# EAGLE board main2 (EAGLE 9.6.2), part 1 of 2
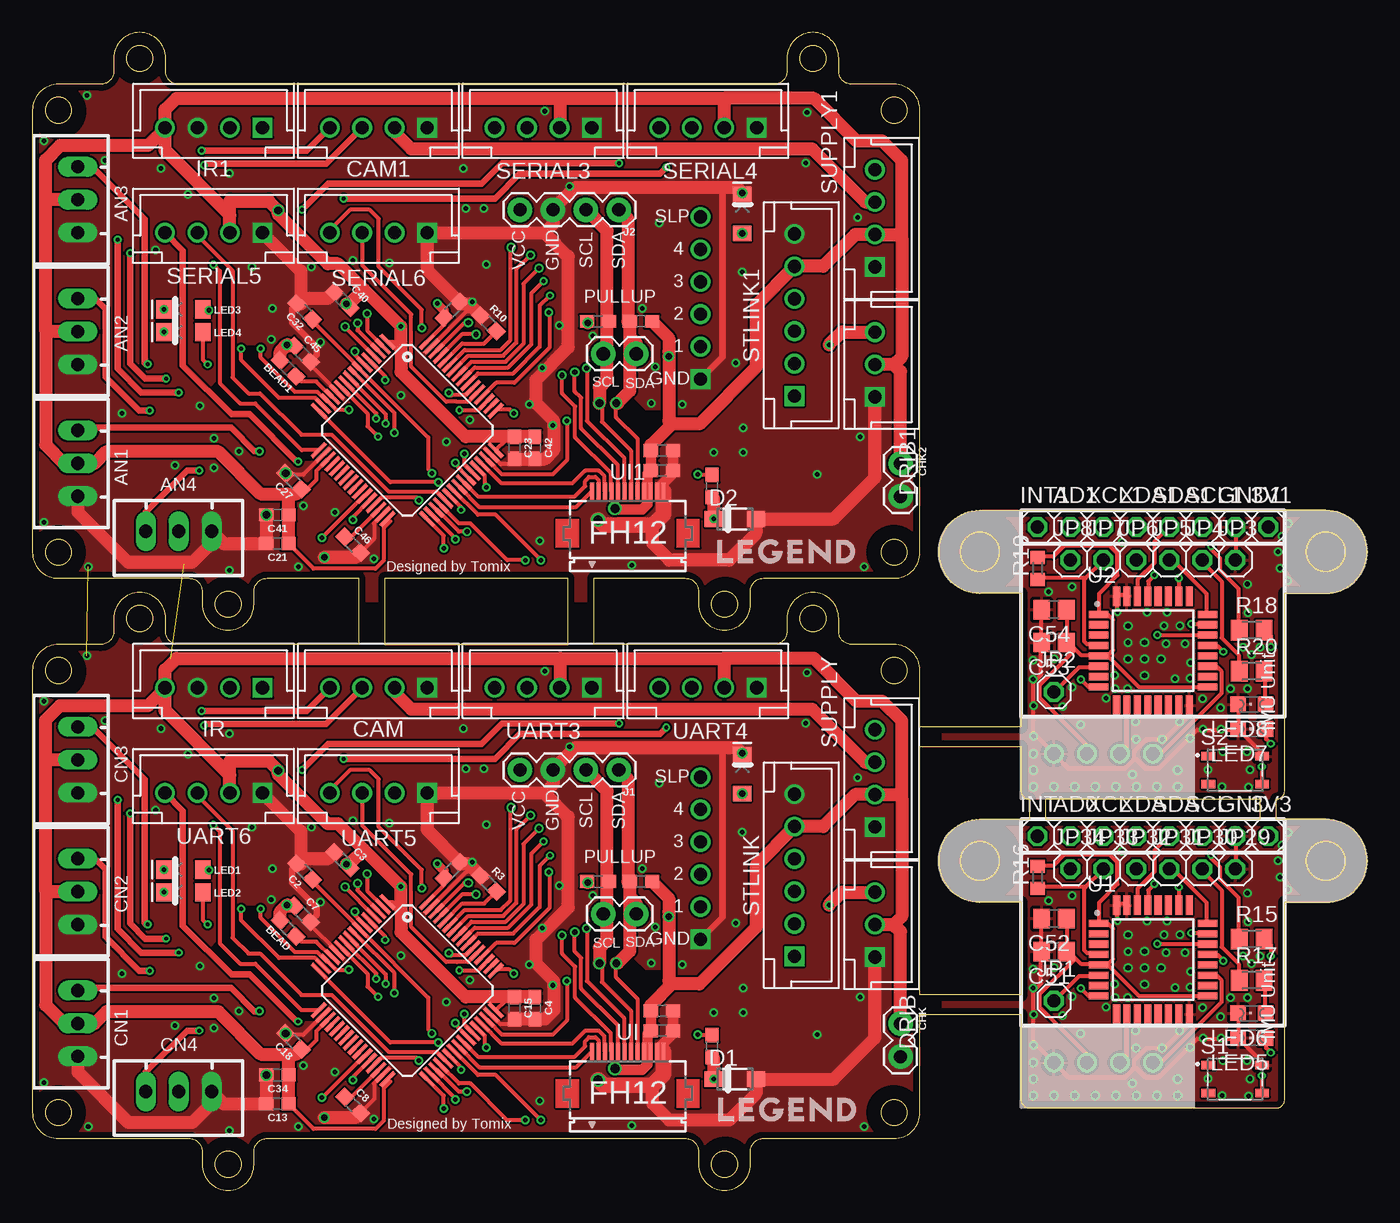
[diagram p0: board, top side]
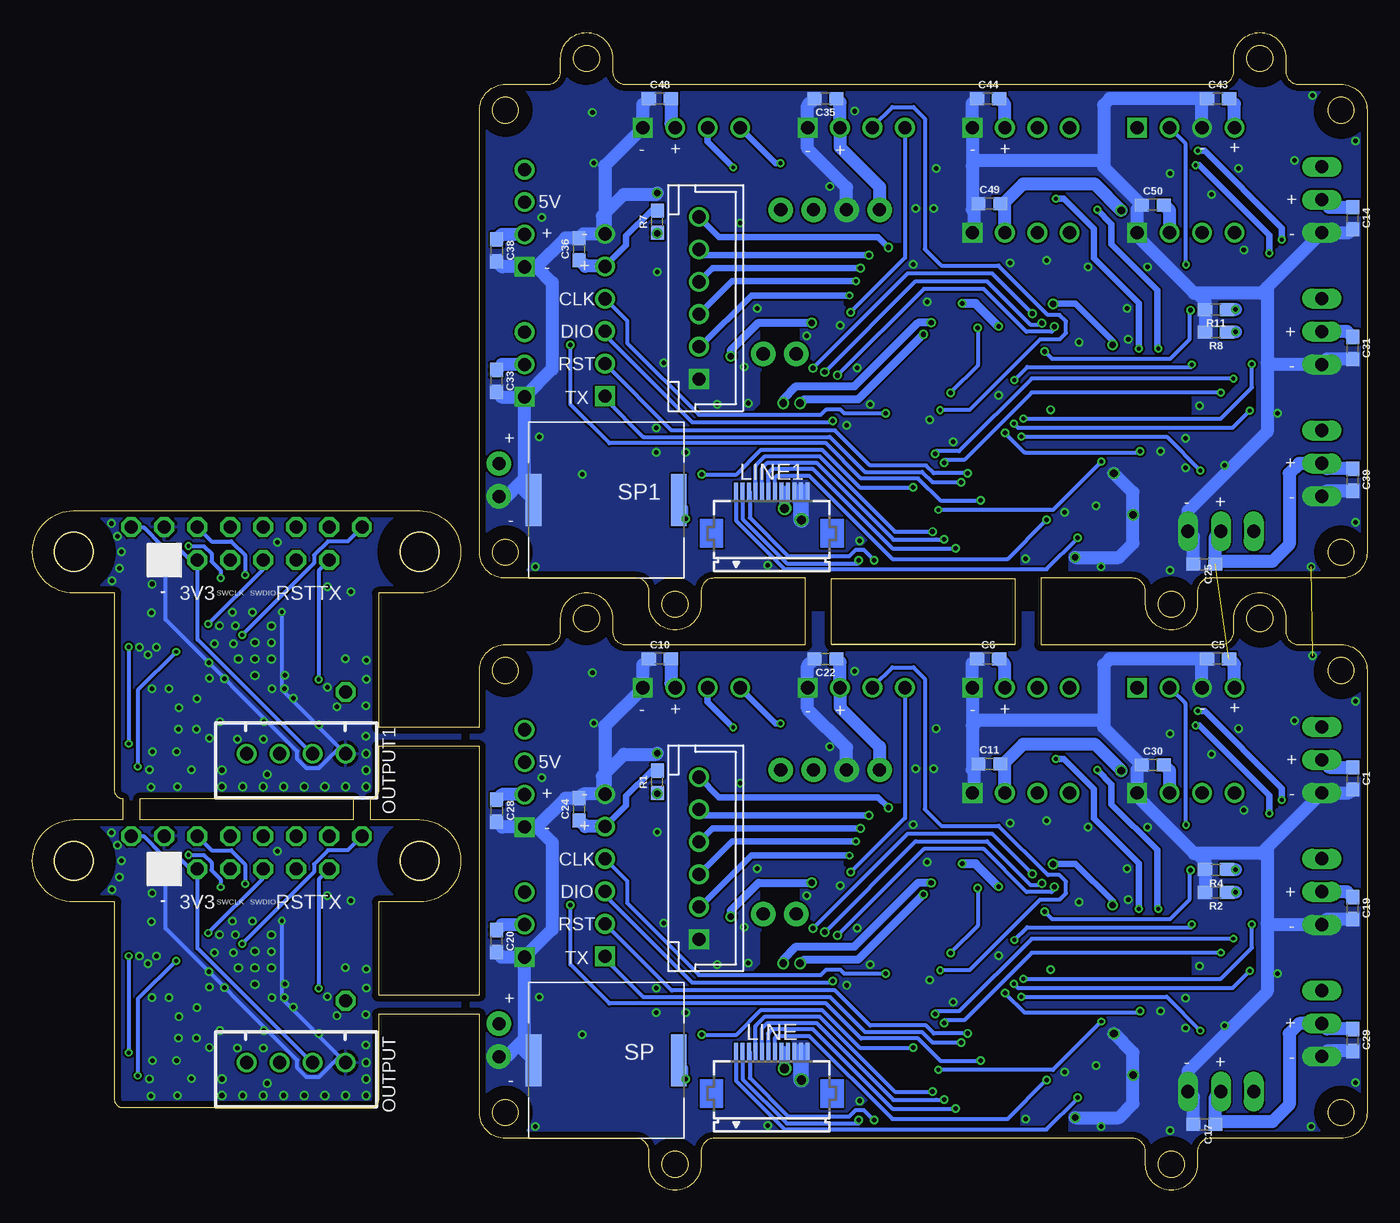
[diagram p1: board, bottom side, seen from below]

Size 102.87 x 89.25 mm. Coordinates in mm from the lower left corner, seen from the top.
Outline: 41.27,42.08 27.14,42.07
Outline: 78.11,28.57 78.11,30.16 94.61,30.16 94.61,28.57 78.11,28.57
Outline: 76.2,35.71 68.42,35.71 68.42,40.07 arc90 66.42,42.07 63.15,42.07 arc-90 62.15,43.07 62.15,44.07 arc180 58.15,44.07 58.15,43.07 arc-90 57.15,42.07 43.27,42.07 43.27,47.18 50.34,47.18 arc-90 51.34,46.18 51.34,45.18 arc180 55.34,45.18 55.34,46.18 arc-90 56.34,47.18 66.42,47.18 arc90 68.42,49.18 68.42,83.25 arc90 66.42,85.25 63.15,85.25 arc-90 62.15,86.25 62.15,87.25 arc180 58.15,87.25 58.15,86.25 arc-90 57.15,85.25 34.21,85.25 11.26,85.25 arc-90 10.26,86.25 10.26,87.25 arc180 6.26,87.25 6.26,86.25 arc-90 5.26,85.25 2,85.25 arc90 0,83.25 0,49.18 arc90 2,47.18 12.08,47.18 arc-90 13.08,46.18 13.08,45.18 arc180 17.08,45.18 17.08,46.18 arc-90 18.08,47.18 25.14,47.18 25.14,42.07 11.26,42.07 arc-90 10.26,43.07 10.26,44.07 arc180 6.26,44.07 6.26,43.07 arc-90 5.26,42.07 2,42.07 arc90 0,40.07 0,6 arc90 2,4 12.08,4 arc-90 13.08,3 13.08,2 arc180 17.08,2 17.08,3 arc-90 18.08,4 34.21,4 50.34,4 arc-90 51.34,3 51.34,2 arc180 55.34,2 55.34,3 arc-90 56.34,4 66.42,4 arc90 68.42,6 68.42,13.55 76.2,13.55 76.2,6.98 arc90 76.83,6.35 95.89,6.35 arc90 96.52,6.98 96.52,22.23 99.69,22.23 arc90 102.87,25.4 arc90 99.69,28.57 95.89,28.57 95.89,30.16 arc90 96.52,30.8 96.52,46.04 99.69,46.04 arc90 102.87,49.21 arc90 99.69,52.39 73.03,52.39 arc90 69.85,49.21 arc90 73.03,46.04 76.2,46.04 76.2,35.71
Outline: 76.2,15.05 68.42,15.05 68.42,34.21 76.2,34.21 76.2,30.8 arc90 76.83,30.16 76.83,28.57 73.03,28.57 arc90 69.85,25.4 arc90 73.03,22.23 76.2,22.23 76.2,15.05
Outline: 27.16,47.17 27.16,42.07 41.27,42.07 41.27,47.17 27.16,47.17
Outline: circle at 2,6 radius 1
Outline: circle at 2,49.18 radius 1
Outline: circle at 73.03,25.4 radius 1.5
Outline: circle at 99.69,25.4 radius 1.5
Outline: circle at 73.03,49.21 radius 1.5
Outline: circle at 99.69,49.21 radius 1.5
Outline: circle at 2,83.25 radius 1
Outline: circle at 66.42,49.18 radius 1
Outline: circle at 66.42,83.25 radius 1
Outline: circle at 8.26,87.25 radius 1
Outline: circle at 60.15,87.25 radius 1
Outline: circle at 15.08,45.18 radius 1
Outline: circle at 53.34,45.18 radius 1
Outline: circle at 2,6 radius 1
Outline: circle at 2,40.07 radius 1
Outline: circle at 66.42,6 radius 1
Outline: circle at 66.42,40.07 radius 1
Outline: circle at 8.26,44.07 radius 1
Outline: circle at 60.15,44.07 radius 1
Outline: circle at 15.08,2 radius 1
Copper layers (1*16): Top 0.035mm / dielectric 1.6mm / Bottom 0.035mm
Design rules "Elecrow_2-layer_PCB_eagle_rule": minimum track width 6mil, minimum drill 12mil, track to track 6mil, track to pad 6mil, pad to pad 6mil, via to via 8mil, smd to smd 0mil, copper to edge 20mil, drill to drill 10mil, minimum pad ring 6mil, minimum via ring 6mil, stop-mask expansion 0mil, vias tented up to drill 100mil, thermal gap 10mil
Net classes: 1 GND: width 0.32 mm, drill 0.254 mm; 2 power: width 0.32 mm, drill 0.102 mm
Holes 3 mm at 73.03,25.4 99.69,25.4 73.03,49.21 99.69,49.21
tRestrict: area -0.1,3.9 to 4.1,8.1; area 13,-0.1 to 17.2,4.1; area 51.3,-0.1 to 55.5,4.1; area 64.3,3.9 to 68.5,8.1; area 64.4,38.1 to 68.4,42.1; area 58.1,42.1 to 62.1,46.1; area 6.2,42.1 to 10.2,46.1; area -0.1,37.9 to 4.1,42.1; area -0.1,47.1 to 4.1,51.2; area 13,43.1 to 17.2,47.3; area 51.3,43.1 to 55.5,47.2; area 64.3,47.1 to 68.5,51.2; area 64.4,81.2 to 68.4,85.3; area 58.1,85.3 to 62.1,89.3; area 6.2,85.3 to 10.2,89.3; area -0.1,81.1 to 4.1,85.3; area 69.9,22.2 to 76.2,28.6; area 96.5,22.2 to 102.9,28.6; area 69.9,46 to 76.2,52.4; area 96.5,46 to 102.9,52.4; 12 lines
bRestrict: area -0.1,37.9 to 4.1,42.1; area 6.1,41.9 to 10.3,46.1; area 58.2,42.1 to 62.2,46.1; area 64.4,38.1 to 68.4,42.1; area 64.4,4 to 68.4,8; area 51.4,0 to 55.4,4; area 13,-0.1 to 17.2,4.1; area 0,4 to 4,8; area -0.1,81.1 to 4.1,85.2; area 6.1,85.1 to 10.3,89.3; area 58.2,85.3 to 62.2,89.3; area 64.4,81.3 to 68.4,85.3; area 64.4,47.2 to 68.4,51.2; area 51.4,43.2 to 55.4,47.2; area 13,43.1 to 17.2,47.3; area 0,47.2 to 4,51.2; area 69.9,22.2 to 76.2,28.6; area 96.5,22.2 to 102.9,28.6; area 69.9,46 to 76.2,52.4; area 96.5,46 to 102.9,52.4; 60 lines

## Footprints (pad centres in the part's own frame; a part is rotated, then mirrored left to right if it is on the bottom)
1X01 = drill 1.016 octagon: 1 0,0
JST-XH-03-PACKAGE-LONG-PAD = drill 1.016 long: 1 -2.54,0; 2 0,0; 3 2.54,0
0603 = smd 1.1 x 1: 1 -0.85,0; 2 0.85,0
1608 = smd 1.1 x 1: 1 -0.85,0; 2 0.85,0
C0805 = smd 1.3 x 1.5: 1 -0.95,0; 2 0.95,0
B4B-XH-A = drill 1.016 square: 1 -3.75,0 | drill 1.016: 2 -1.25,0; 3 1.25,0; 4 3.75,0
1X02 = drill 1.016 pad 1.88: 1 0,0; 2 2.54,0
SOD123FL = smd 1.397 x 1.22: A 1.625,0; C -1.625,0
B3B-XH-A = drill 1.016 square: 1 -2.5,0 | drill 1.016: 2 0,0; 3 2.5,0
1X04 = drill 1.016 pad 1.88: 1 0,0; 2 2.54,0; 3 5.08,0; 4 7.62,0
LED-1206 = smd 1.2 x 1.4: A -1.5,0; C 1.5,0
CHIPLED_0805 = smd 1.2 x 1.2: A 0,-1.05; C 0,1.05
FH12-12S-0.5SH = smd 0.3 x 1.3: 1 -2.75,3.25; 2 -2.25,3.25; 3 -1.75,3.25; 4 -1.25,3.25; 5 -0.75,3.25; 6 -0.25,3.25; 7 0.25,3.25; 8 0.75,3.25; 9 1.25,3.25; 10 1.75,3.25; 11 2.25,3.25; 12 2.75,3.25
B6B-XH-A = drill 1.016 square: 1 -6.25,0 | drill 1.016: 2 -3.75,0; 3 -1.25,0; 4 1.25,0; 5 3.75,0; 6 6.25,0
STM32F446RET6 = smd 0.3 x 1.5: BOOT0 -1.75,5.9; PA3 -3.75,-5.9; PA4 -2.25,-5.9; PA5 -1.75,-5.9; PA6 -1.25,-5.9; PA7 -0.75,-5.9; PA14 3.75,5.9; PA15 3.25,5.9; PB0 0.75,-5.9; PB1 1.25,-5.9; PB2 1.75,-5.9; PB3 0.75,5.9; PB4 0.25,5.9; PB5 -0.25,5.9; PB6 -0.75,5.9; PB7 -1.25,5.9; PB8 -2.25,5.9; PB9 -2.75,5.9; PB10 2.25,-5.9; PC4 -0.25,-5.9; PC5 0.25,-5.9; PC10 2.75,5.9; PC11 2.25,5.9; PC12 1.75,5.9; PD2 1.25,5.9; VCAP_1 2.75,-5.9; VDD -2.75,-5.9; VDD1 3.75,-5.9; VDD3 -3.75,5.9; VSS -3.25,-5.9; VSS1 3.25,-5.9; VSS3 -3.25,5.9 | smd 1.5 x 0.3: NRST -5.9,0.75; PA0 -5.9,-2.75; PA1 -5.9,-3.25; PA2 -5.9,-3.75; PA8 5.9,0.25; PA9 5.9,0.75; PA10 5.9,1.25; PA11 5.9,1.75; PA12 5.9,2.25; PA13 5.9,2.75; PB12 5.9,-3.75; PB13 5.9,-3.25; PB14 5.9,-2.75; PB15 5.9,-2.25; PC0 -5.9,0.25; PC1 -5.9,-0.25; PC2 -5.9,-0.75; PC3 -5.9,-1.25; PC6 5.9,-1.75; PC7 5.9,-1.25; PC8 5.9,-0.75; PC9 5.9,-0.25; PC13 -5.9,3.25; PC14 -5.9,2.75; PC15 -5.9,2.25; PH0 -5.9,1.75; PH1 -5.9,1.25; VBAT -5.9,3.75; VDD2 5.9,3.75; VREF+ -5.9,-2.25; VREF- -5.9,-1.75; VSS2 5.9,3.25
JST-XH-04-PACKAGE-ROUND-PAD = drill 1.016: 1 -3.81,0; 2 -1.27,0; 3 1.27,0; 4 3.81,0
R0603 = smd 1.1 x 1: 1 -0.85,0; 2 0.85,0
M0805 = smd 1.3 x 1.6: 1 -0.95,0; 2 0.95,0
R0603' = smd 1 x 1.1: 1 -0.85,0; 2 0.85,0
SW_SKRPACE010 = smd 1.05 x 0.65: 1 -2.075,1.075; 2 2.075,1.075; 3 -2.075,-1.075; 4 2.075,-1.075
PKLCS1212E4001 = smd 1.2 x 4: 1 -5.6,0; 2 5.6,0
QFP80P900X900X160-32N = smd 1.5 x 0.55: 1 -4.2,2.8; 2 -4.2,2; 3 -4.2,1.2; 4 -4.2,0.4; 5 -4.2,-0.4; 6 -4.2,-1.2; 7 -4.2,-2; 8 -4.2,-2.8; 17 4.2,-2.8; 18 4.2,-2; 19 4.2,-1.2; 20 4.2,-0.4; 21 4.2,0.4; 22 4.2,1.2; 23 4.2,2; 24 4.2,2.8 | smd 0.55 x 1.5: 9 -2.8,-4.2; 10 -2,-4.2; 11 -1.2,-4.2; 12 -0.4,-4.2; 13 0.4,-4.2; 14 1.2,-4.2; 15 2,-4.2; 16 2.8,-4.2; 25 2.8,4.2; 26 2,4.2; 27 1.2,4.2; 28 0.4,4.2; 29 -0.4,4.2; 30 -1.2,4.2; 31 -2,4.2; 32 -2.8,4.2

## Placement (x,y rotation side)
3V1  [1X01]  95.25,51.12 0 top
3V3  [1X01]  95.25,27.3 0 top
AD0  [1X01]  80.01,27.3 0 top
AD1  [1X01]  80.01,51.12 0 top
AN1  1  [JST-XH-03-PACKAGE-LONG-PAD]  3.49,56.04 90 top
AN2  2  [JST-XH-03-PACKAGE-LONG-PAD]  3.49,66.2 90 top
AN3  3  [JST-XH-03-PACKAGE-LONG-PAD]  3.49,76.36 90 top
AN4  4  [JST-XH-03-PACKAGE-LONG-PAD]  11.27,50.8 180 top
BEAD  0  [0603]  19.7,20.18 135 top
BEAD1  0  [0603]  19.7,63.37 135 top
C1  0.1uF  [1608]  1.11,31.75 270 bottom
C2  0.1UF_1608  [1608]  20.98,24.56 135 top
C3  0.1UF_1608  [1608]  23.89,25.45 315 top
C4  0.1UF_1608  [1608]  38.72,14.05 270 top
C5  0.1UF_1608  [1608]  11.49,40.97 0 bottom
C6  0.1UF_1608  [1608]  29.21,40.97 0 bottom
C7  0.1UF_1608  [1608]  20.81,21.3 315 top
C8  4.7uF  [0603]  24.68,6.58 315 top
C9  0.1uF  [0603]  32.34,24.68 45 top
C10  0.1UF_1608  [1608]  54.51,40.97 0 bottom
C11  0.1UF_1608  [1608]  29.11,32.88 0 bottom
C12  0.1UF_1608  [1608]  48.52,13.84 0 top
C13  0.1UF_1608  [1608]  18.89,6.67 180 top
C14  0.1uF  [1608]  1.11,74.93 270 bottom
C15  0.1UF_1608  [1608]  37.15,14.05 270 top
C16  0.1UF_1608  [1608]  48.52,57.02 0 top
C17  0.1UF_1608  [1608]  12.54,5.08 180 bottom
C18  0.1UF_1608  [1608]  20.12,11.48 135 top
C19  0.1UF_1608  [1608]  1.11,21.75 270 bottom
C20  0.1UF_1608  [1608]  67.11,19.21 270 bottom
C21  0.1UF_1608  [1608]  18.89,49.85 180 top
C22  0.1UF_1608  [1608]  41.75,40.97 180 bottom
C23  0.1UF_1608  [1608]  37.15,57.23 270 top
C24  0.1UF_1608  [1608]  60.73,29.37 90 bottom
C25  0.1UF_1608  [1608]  12.54,48.26 180 bottom
C26  0.001UF_1608  [1608]  48.52,12.31 0 top
C27  0.1UF_1608  [1608]  20.12,54.66 135 top
C28  1.0UF_1608  [1608]  67.08,29.27 270 bottom
C29  1.0UF_1608  [1608]  1.11,11.59 270 bottom
C30  0.1UF_1608  [1608]  16.51,32.77 0 bottom
C31  0.1UF_1608  [1608]  1.11,64.93 270 bottom
C32  0.1UF_1608  [1608]  20.98,67.74 135 top
C33  0.1UF_1608  [1608]  67.11,62.39 270 bottom
C34  0.1uF  [0603]  18.89,8.89 180 top
C35  0.1UF_1608  [1608]  41.75,84.15 180 bottom
C36  0.1UF_1608  [1608]  60.73,72.55 90 bottom
C37  0.001UF_1608  [1608]  48.52,55.49 0 top
C38  1.0UF_1608  [1608]  67.08,72.45 270 bottom
C39  1.0UF_1608  [1608]  1.11,54.77 270 bottom
C40  0.1UF_1608  [1608]  23.89,68.63 315 top
C41  0.1uF  [0603]  18.89,52.07 180 top
C42  0.1UF_1608  [1608]  38.72,57.23 270 top
C43  0.1UF_1608  [1608]  11.49,84.15 0 bottom
C44  0.1UF_1608  [1608]  29.21,84.15 0 bottom
C45  0.1UF_1608  [1608]  20.81,64.48 315 top
C46  4.7uF  [0603]  24.68,49.77 315 top
C47  0.1uF  [0603]  32.34,67.86 45 top
C48  0.1UF_1608  [1608]  54.51,84.15 0 bottom
C49  0.1UF_1608  [1608]  29.11,76.06 0 bottom
C50  0.1UF_1608  [1608]  16.51,75.95 0 bottom
C51  0.1u  [C0805]  78.74,18.41 180 top
C52  0.1u  [C0805]  78.74,20.95 180 top
C53  0.1u  [C0805]  78.74,42.23 180 top
C54  0.1u  [C0805]  78.74,44.77 180 top
CAM  cam  [B4B-XH-A]  26.67,38.73 180 top
CAM1  cam  [B4B-XH-A]  26.67,81.92 180 top
CHK  +3V3  [1X02]  66.91,12.84 270 top
CHK1  +3V3  [1X02]  44,21.3 0 top
CHK2  +3V3  [1X02]  66.91,56.02 270 top
CHK3  +3V3  [1X02]  44,64.48 0 top
CN1  1  [JST-XH-03-PACKAGE-LONG-PAD]  3.49,12.86 90 top
CN2  2  [JST-XH-03-PACKAGE-LONG-PAD]  3.49,23.02 90 top
CN3  3  [JST-XH-03-PACKAGE-LONG-PAD]  3.49,33.18 90 top
CN4  4  [JST-XH-03-PACKAGE-LONG-PAD]  11.27,7.62 180 top
D1  DIODE-SS2040LFL  [SOD123FL]  54.13,8.57 0 top
D2  DIODE-SS2040LFL  [SOD123FL]  54.13,51.75 0 top
DRIB  [B3B-XH-A]  64.93,20.48 90 top
DRIB1  [B3B-XH-A]  64.93,63.66 90 top
GND  [1X01]  92.71,27.3 0 top
GND1  [1X01]  92.71,51.12 0 top
INT  [1X01]  77.47,27.3 0 top
INT1  [1X01]  77.47,51.12 0 top
IR  IR  [B4B-XH-A]  13.97,38.73 180 top
IR1  IR  [B4B-XH-A]  13.97,81.92 180 top
J1  [1X04]  45.2,32.4 180 top
J2  [1X04]  45.2,75.58 180 top
JP1  [1X01]  78.74,14.6 0 top
JP2  [1X01]  78.74,38.42 0 top
JP3  [1X01]  92.71,48.58 0 top
JP4  [1X01]  90.17,48.58 0 top
JP5  [1X01]  87.63,48.58 0 top
JP6  [1X01]  85.09,48.58 0 top
JP7  [1X01]  82.55,48.58 0 top
JP8  [1X01]  80.01,48.58 0 top
JP29  [1X01]  92.71,24.77 0 top
JP30  [1X01]  90.17,24.77 0 top
JP31  [1X01]  87.63,24.77 0 top
JP32  [1X01]  85.09,24.77 0 top
JP33  [1X01]  82.55,24.77 0 top
JP34  [1X01]  80.01,24.77 0 top
LED1  [LED-1206]  11.63,24.72 180 top
LED2  [LED-1206]  11.63,22.98 180 top
LED3  [LED-1206]  11.63,67.9 180 top
LED4  [LED-1206]  11.63,66.16 180 top
LED5  [CHIPLED_0805]  93.98,11.75 90 top
LED6  [CHIPLED_0805]  93.98,13.65 90 top
LED7  [CHIPLED_0805]  93.98,35.56 90 top
LED8  [CHIPLED_0805]  93.98,37.47 90 top
LINE  FH12-12S-0.5SH  [FH12-12S-0.5SH]  45.88,7.46 0 bottom
LINE1  FH12-12S-0.5SH  [FH12-12S-0.5SH]  45.88,50.64 0 bottom
MD_A  [B6B-XH-A]  51.5,25.6 90 bottom
MD_A1  [B6B-XH-A]  51.5,68.78 90 bottom
NUCLEO_MAIN  F446RET6  [STM32F446RET6]  28.89,15.4 315 top
NUCLEO_MAIN1  F446RET6  [STM32F446RET6]  28.89,58.58 315 top
OUTPUT  JST-XH-04-PIN-ROUND-PAD  [JST-XH-04-PACKAGE-ROUND-PAD]  82.55,9.84 180 bottom
OUTPUT1  JST-XH-04-PIN-ROUND-PAD  [JST-XH-04-PACKAGE-ROUND-PAD]  82.55,33.66 180 bottom
PILOT  [LED-1206]  54.7,32.09 90 top
PILOT1  [LED-1206]  54.7,75.27 90 top
R1  1k  [R0603]  54.7,31.49 90 bottom
R2  1k  [R0603]  11.63,22.98 180 bottom
R3  10k  [R0603]  35.16,23.64 315 top
R4  1k  [R0603]  11.63,24.72 180 bottom
R5  1k  [R0603]  46.9,23.8 0 top
R6  1k  [R0603]  43.6,23.8 180 top
R7  1k  [R0603]  54.7,74.67 90 bottom
R8  1k  [R0603]  11.63,66.16 180 bottom
R9  1k  [R0603]  52.39,11.11 270 top
R10  10k  [R0603]  35.16,66.82 315 top
R11  1k  [R0603]  11.63,67.9 180 bottom
R12  1k  [R0603]  52.39,54.29 270 top
R13  1k  [R0603]  46.9,66.98 0 top
R14  1k  [R0603]  43.6,66.98 180 top
R15  1k  [M0805]  93.98,19.37 0 top
R16  10k  [R0603']  77.47,24.13 90 top
R17  1k  [M0805]  93.98,16.19 0 top
R18  1k  [M0805]  93.98,43.18 0 top
R19  10k  [R0603']  77.47,47.94 90 top
R20  1k  [M0805]  93.98,40.01 0 top
S1  SKRPACE010  [SW_SKRPACE010]  92.71,8.57 0 top
S2  SKRPACE010  [SW_SKRPACE010]  92.71,32.38 0 top
SCL  [1X01]  90.17,27.3 0 top
SCL1  [1X01]  90.17,51.12 0 top
SDA  [1X01]  87.63,27.3 0 top
SDA1  [1X01]  87.63,51.12 0 top
SERIAL3  IMU  [B4B-XH-A]  39.37,81.92 180 top
SERIAL4  IMU  [B4B-XH-A]  52.07,81.92 180 top
SERIAL5  IMU  [B4B-XH-A]  13.97,73.82 180 top
SERIAL6  IMU  [B4B-XH-A]  26.67,73.82 180 top
SP  [PKLCS1212E4001]  58.64,10.02 180 bottom
SP1  [PKLCS1212E4001]  58.64,53.2 180 bottom
STLINK  MAIN  [B6B-XH-A]  58.74,24.29 90 top
STLINK1  MAIN  [B6B-XH-A]  58.74,67.47 90 top
SUPPLY  [B4B-XH-A]  64.93,31.75 90 top
SUPPLY1  [B4B-XH-A]  64.93,74.93 90 top
U1  STM32F303K8T6  [QFP80P900X900X160-32N]  86.36,17.78 0 top
U2  STM32F303K8T6  [QFP80P900X900X160-32N]  86.36,41.59 0 top
UART3  IMU  [B4B-XH-A]  39.37,38.73 180 top
UART4  IMU  [B4B-XH-A]  52.07,38.73 180 top
UART5  IMU  [B4B-XH-A]  26.67,30.64 180 top
UART6  IMU  [B4B-XH-A]  13.97,30.64 180 top
UI  FH12-12S-0.5SH  [FH12-12S-0.5SH]  45.88,7.46 0 top
UI1  FH12-12S-0.5SH  [FH12-12S-0.5SH]  45.88,50.64 0 top
XCL  [1X01]  82.55,27.3 0 top
XCL1  [1X01]  82.55,51.12 0 top
XDA  [1X01]  85.09,27.3 0 top
XDA1  [1X01]  85.09,51.12 0 top

## Library data of the parts
3V1 3V3 AD0 AD1 GND GND1 INT INT1 JP1-JP8 JP29-JP34 SCL SCL1 SDA SDA1 XCL XCL1 XDA XDA1 = pinhead
AN1-AN4 CN1-CN4 OUTPUT OUTPUT1 = JST XH Connectors
BEAD BEAD1 = SparkFun-Resistors; PROD_ID: RES-08609
C1-C7 C10-C25 C27 C30-C33 C35 C36 C40 C42-C45 C48-C50 LED1-LED4 PILOT PILOT1 = Custom_Designed_By_Yusei
C8 C9 C34 C41 C46 C47 = SparkFun-Capacitors; PROD_ID: CAP-00810
C26 C37 = Custom_Designed_By_Yusei; CAPACITY: 0.001uF
C28 C38 = Custom_Designed_By_Yusei; CAPACITY: 1.0uF
C29 C39 = Custom_Designed_By_Yusei; CAPACITY: 1.0uF; SPECIFICATION: X5R
C51-C54 R15-R20 = resistor
CAM CAM1 DRIB DRIB1 IR IR1 MD_A MD_A1 SERIAL3-SERIAL6 STLINK STLINK1 SUPPLY SUPPLY1 UART3-UART6 = jst-xh
CHK CHK1-CHK3 = SparkFun-Connectors
D1 D2 = Custom_Designed_By_Yusei; CATEGORY: Optional
J1 J2 = SparkFun-Connectors; PROD_ID: CONN-09696
LED5-LED8 = led
LINE LINE1 UI UI1 = con-hirose; MPN: FH12-12S-0.5SH(55); OC_FARNELL: 1324542; OC_NEWARK: 34M6155
NUCLEO_MAIN NUCLEO_MAIN1 = STM32F446RET6
R1-R8 R10 R11 R13 R14 = Custom_Designed_By_Yusei; PROD_ID: RES-07856
R9 R12 = Custom_Designed_By_Yusei; CATEGORY: Optional; PROD_ID: RES-07856
S1 S2 = Alps SW; AVAILABILITY: Good; DESCRIPTION: Switch Tactile N.O. SPST Button J-Bend 0.05A 16VDC 2.55N SMD Automotive T/R; MF: ALPS; MP: SKRPACE010; PACKAGE: None; PRICE: 0.29 USD
SP SP1 = pklcs1212e4001-r1
U1 U2 = STM32F303K8T6; AVAILABILITY: Good; DESCRIPTION: Analog and DSP with FPU ARM Cortex-M4 MCU with 64 Kbytes Flash, 72 MHz CPU, CCM, 12-bit ADC 5 MSPS, comparators, op-amp; MF: STMicroelectronics; MP: STM32F303K8T6; PACKAGE: LQFP-32 STMicroelectronics; PRICE: 3.02 USD

## Nets
+3V1 [power]: 3V1.1 C53.1 C54.1 JP4.1 OUTPUT1.2 R19.2 R20.1 U2.1 U2.5 U2.17
+3V3 [power]: 3V3.1 C51.1 C52.1 JP30.1 OUTPUT.2 R16.2 R17.1 U1.1 U1.5 U1.17
+5V: C6.2 CAM.2 SUPPLY.3
+5V1: C44.2 CAM1.2 SUPPLY1.3
A0: JP1.1 U1.6
A1: U1.7
A2: U1.9
A3: U2.13
A4: U1.11
A5: U1.12
A6: U1.13
A7: U2.9
A8: U2.7
A9: JP2.1 U2.6
A10: U2.12
A11: U2.11
ANALOG: OUTPUT.3 U1.10
ANALOG1: OUTPUT1.3 U2.10
BALLRX: IR.2 NUCLEO_MAIN.PA3
BALLRX1: IR1.2 NUCLEO_MAIN1.PA3
BOOT0: NUCLEO_MAIN.BOOT0 R3.2
BOOT1: NUCLEO_MAIN1.BOOT0 R10.2
BUTTON_CENTER: NUCLEO_MAIN.PC14 UI.5
BUTTON_CENTER1: NUCLEO_MAIN1.PC14 UI1.5
BUTTON_LEFT: NUCLEO_MAIN.PC15 UI.4
BUTTON_LEFT1: NUCLEO_MAIN1.PC15 UI1.4
BUTTON_RIGHT: NUCLEO_MAIN.PC13 UI.6
BUTTON_RIGHT1: NUCLEO_MAIN1.PC13 UI1.6
BUZZER: NUCLEO_MAIN.PA11 R9.1
BUZZER1: NUCLEO_MAIN1.PA11 R12.1
CN1: CN1.3 NUCLEO_MAIN.PC0
CN2: CN2.3 NUCLEO_MAIN.PC1
CN3: CN3.3 NUCLEO_MAIN.PC2
CN4: CN4.3 NUCLEO_MAIN.PC3
CN5: AN1.3 NUCLEO_MAIN1.PC0
CN6: AN2.3 NUCLEO_MAIN1.PC1
CN7: AN3.3 NUCLEO_MAIN1.PC2
CN8: AN4.3 NUCLEO_MAIN1.PC3
D0: U1.20
D1: U2.2
D2: U2.3
D3: U1.14
D4 [power]: U2.27
D5: R18.1 U2.26
D6: U1.15
D7: U1.2
D8: U1.3
D9: U1.18
D10: U2.20
D11: U1.28
D12 [power]: U1.27
D13: R15.1 U1.26
D14: U2.14
D15: U2.15
D16: U2.18
D17: U2.28
DRIB_PWM: DRIB.3 NUCLEO_MAIN.PB10
DRIB_PWM1: DRIB1.3 NUCLEO_MAIN1.PB10
GND [GND]: C51.2 C52.2 GND.1 JP29.1 LED5.C LED6.C OUTPUT.1 S1.2 U1.16 U1.31 U1.32
GND1 [GND]: C53.2 C54.2 GND1.1 JP3.1 LED7.C LED8.C OUTPUT1.1 S2.2 U2.16 U2.31 U2.32
INT: INT.1 U1.22
INT1: INT1.1 U2.22
LED1: LED1.A NUCLEO_MAIN.PH1
LED2: LED2.A NUCLEO_MAIN.PH0
LED3: LED4.A NUCLEO_MAIN1.PH0
LED4: LED3.A NUCLEO_MAIN1.PH1
LINE_A0: LINE.6 NUCLEO_MAIN.PB12
LINE_A1: LINE.5 NUCLEO_MAIN.PB13
LINE_A2: LINE.4 NUCLEO_MAIN.PB14
LINE_A3: LINE.3 NUCLEO_MAIN.PB15
LINE_A4: LINE.2 NUCLEO_MAIN.PC8
LINE_A5: LINE1.2 NUCLEO_MAIN1.PC8
LINE_A6: LINE1.3 NUCLEO_MAIN1.PB15
LINE_A7: LINE1.4 NUCLEO_MAIN1.PB14
LINE_A8: LINE1.5 NUCLEO_MAIN1.PB13
LINE_A9: LINE1.6 NUCLEO_MAIN1.PB12
LINE_ANALOG: LINE.1 NUCLEO_MAIN.PB1
LINE_ANALOG1: LINE1.1 NUCLEO_MAIN1.PB1
LINE_PWM: LINE.7 NUCLEO_MAIN.PB2
LINE_PWM1: LINE1.7 NUCLEO_MAIN1.PB2
N$1: LED2.C R2.1
N$2: LED1.C R4.1
N$3: LED4.C R8.1
N$4: LED3.C R11.1
N$5: LED5.A R15.2
N$6: XDA.1
N$7: XCL.1
N$8: AD0.1
N$9: LED6.A R17.2
N$10: LED7.A R18.2
N$11: XDA1.1
N$12: XCL1.1
N$13: AD1.1
N$14: LED8.A R20.2
NRST: C2.1 NUCLEO_MAIN.NRST STLINK.2
NRST1: C32.1 NUCLEO_MAIN1.NRST STLINK1.2
PH1: MD_A.2 NUCLEO_MAIN.PB3
PH2: MD_A.3 NUCLEO_MAIN.PB4
PH3: MD_A.4 NUCLEO_MAIN.PB5
PH4: MD_A.5 NUCLEO_MAIN.PB6
PH5: MD_A1.4 NUCLEO_MAIN1.PB5
PH6: MD_A1.3 NUCLEO_MAIN1.PB4
PH7: MD_A1.2 NUCLEO_MAIN1.PB3
PH8: MD_A1.5 NUCLEO_MAIN1.PB6
POWERLED_RESISTOR: PILOT.A R1.1
POWERLED_RESISTOR1: PILOT1.A R7.1
RESET: JP33.1 R16.1 U1.4
RESET1: JP7.1 R19.1 U2.4
RGB_B: NUCLEO_MAIN.PA12 UI.3
RGB_B1: NUCLEO_MAIN1.PA12 UI1.3
RGB_G: NUCLEO_MAIN.PA8 UI.2
RGB_G1: NUCLEO_MAIN1.PA8 UI1.2
RGB_R: NUCLEO_MAIN.PC9 UI.1
RGB_R1: NUCLEO_MAIN1.PC9 UI1.1
SCL: CHK1.1 J1.2 NUCLEO_MAIN.PB8 R6.1 UI.7
SCL1: CHK3.1 J2.2 NUCLEO_MAIN1.PB8 R14.1 UI1.7
SCL2: SCL.1 U1.29
SCL3: SCL1.1 U2.29
SDA: CHK1.2 J1.1 NUCLEO_MAIN.PB9 R5.1 UI.8
SDA1: CHK3.2 J2.1 NUCLEO_MAIN1.PB9 R13.1 UI1.8
SDA2: SDA.1 U1.30
SDA3: SDA1.1 U2.30
SERIAL1RX: CAM.3 NUCLEO_MAIN.PA10
SERIAL1RX1: CAM1.3 NUCLEO_MAIN1.PA10
SERIAL1TX: CAM.4 NUCLEO_MAIN.PA9
SERIAL1TX1: CAM1.4 NUCLEO_MAIN1.PA9
SERIAL3RX: NUCLEO_MAIN.PC11 UART3.4
SERIAL3RX1: NUCLEO_MAIN1.PC11 SERIAL3.4
SERIAL3TX: NUCLEO_MAIN.PC10 UART3.3
SERIAL3TX1: NUCLEO_MAIN1.PC10 SERIAL3.3
SERIAL4RX: NUCLEO_MAIN.PA1 UART4.4
SERIAL4RX1: NUCLEO_MAIN1.PA1 SERIAL4.4
SERIAL4TX: NUCLEO_MAIN.PA0 UART4.3
SERIAL4TX1: NUCLEO_MAIN1.PA0 SERIAL4.3
SERIAL5RX: NUCLEO_MAIN.PD2 UART5.4
SERIAL5RX1: NUCLEO_MAIN1.PD2 SERIAL6.4
SERIAL5TX: NUCLEO_MAIN.PC12 UART5.3
SERIAL5TX1: NUCLEO_MAIN1.PC12 SERIAL6.3
SERIAL6RX: NUCLEO_MAIN.PC7 UART6.4
SERIAL6RX1: NUCLEO_MAIN1.PC7 SERIAL5.4
SERIAL6TX: NUCLEO_MAIN.PC6 UART6.3
SERIAL6TX1: NUCLEO_MAIN1.PC6 SERIAL5.3
SLEEP: MD_A.6 NUCLEO_MAIN.PB7
SLEEP1: MD_A1.6 NUCLEO_MAIN1.PB7
SP: D1.C R9.2 SP.1
SP1: D2.C R12.2 SP1.1
SW: S1.4 U1.21
SW1: S2.4 U2.21
SWCLK: NUCLEO_MAIN.PA14 STLINK.4
SWCLK1: NUCLEO_MAIN1.PA14 STLINK1.4
SWCLK2: JP31.1 U1.24
SWCLK3: JP5.1 U2.24
SWDIO: NUCLEO_MAIN.PA13 STLINK.3
SWDIO1: NUCLEO_MAIN1.PA13 STLINK1.3
SWDIO2: JP32.1 U1.23
SWDIO3: JP6.1 U2.23
TX1: OUTPUT.4 U1.19
TX2: OUTPUT1.4 U2.19
USBTX: NUCLEO_MAIN.PA2 STLINK.1
USBTX1: NUCLEO_MAIN1.PA2 STLINK1.1
USBTX2: JP34.1 U1.8
USBTX3: JP8.1 U2.8
VBAT: SUPPLY.4
VBAT1: SUPPLY1.4
VCAP: C8.1 NUCLEO_MAIN.VCAP_1
VCAP1: C46.1 NUCLEO_MAIN1.VCAP_1
VCC: AN1.2 AN2.2 AN3.2 AN4.2 BEAD1.2 BEAD.2 C1.1 C3.2 C4.1 C5.2 C7.1 C9.1 C10.2 C11.2 C12.1 C13.1 C14.1 C15.1 C16.1 C17.1 C18.1 C19.1 C20.1 C21.1 C22.1 C23.1 C24.1 C25.1 C26.1 C27.1 C28.1 C29.1 C30.2 C31.1 C33.1 C34.1 C35.1 C36.1 C37.1 C38.1 C39.1 C40.2 C41.1 C42.1 C43.2 C45.1 C47.1 C48.2 C49.2 C50.2 CHK2.1 CHK.1 CN1.2 CN2.2 CN3.2 CN4.2 DRIB1.2 DRIB.2 IR1.4 IR.4 J1.4 J2.4 LINE1.8 LINE1.9 LINE.8 LINE.9 NUCLEO_MAIN1.VBAT NUCLEO_MAIN1.VDD NUCLEO_MAIN1.VDD1 NUCLEO_MAIN1.VDD2 NUCLEO_MAIN1.VDD3 NUCLEO_MAIN.VBAT NUCLEO_MAIN.VDD NUCLEO_MAIN.VDD1 NUCLEO_MAIN.VDD2 NUCLEO_MAIN.VDD3 R1.2 R5.2 R6.2 R7.2 R13.2 R14.2 SERIAL3.2 SERIAL4.2 SERIAL5.2 SERIAL6.2 STLINK1.5 STLINK.5 SUPPLY1.2 SUPPLY.2 UART3.2 UART4.2 UART5.2 UART6.2 UI1.9 UI1.10 UI.9 UI.10
VCPRX: U1.25
VCPRX1: U2.25
VDDA: BEAD.1 NUCLEO_MAIN.VREF+
VDDA1: BEAD1.1 NUCLEO_MAIN1.VREF+
VSS: AN1.1 AN2.1 AN3.1 AN4.1 C1.2 C2.2 C3.1 C4.2 C5.1 C6.1 C7.2 C8.2 C9.2 C10.1 C11.1 C12.2 C13.2 C14.2 C15.2 C16.2 C17.2 C18.2 C19.2 C20.2 C21.2 C22.2 C23.2 C24.2 C25.2 C26.2 C27.2 C28.2 C29.2 C30.1 C31.2 C32.2 C33.2 C34.2 C35.2 C36.2 C37.2 C38.2 C39.2 C40.1 C41.2 C42.2 C43.1 C44.1 C45.2 C46.2 C47.2 C48.1 C49.1 C50.1 CAM1.1 CAM.1 CHK2.2 CHK.2 CN1.1 CN2.1 CN3.1 CN4.1 D1.A D2.A DRIB1.1 DRIB.1 IR1.3 IR.3 J1.3 J2.3 LINE1.10 LINE1.11 LINE1.12 LINE.10 LINE.11 LINE.12 MD_A1.1 MD_A.1 NUCLEO_MAIN1.VREF- NUCLEO_MAIN1.VSS NUCLEO_MAIN1.VSS1 NUCLEO_MAIN1.VSS2 NUCLEO_MAIN1.VSS3 NUCLEO_MAIN.VREF- NUCLEO_MAIN.VSS NUCLEO_MAIN.VSS1 NUCLEO_MAIN.VSS2 NUCLEO_MAIN.VSS3 PILOT1.C PILOT.C R2.2 R3.1 R4.2 R8.2 R10.1 R11.2 SERIAL3.1 SERIAL4.1 SERIAL5.1 SERIAL6.1 SP1.2 SP.2 STLINK1.6 STLINK.6 SUPPLY1.1 SUPPLY.1 UART3.1 UART4.1 UART5.1 UART6.1 UI1.11 UI1.12 UI.11 UI.12